# Altium PCB ltc3115.PcbDoc
Units mil, origin at the board's own origin, x right, y up, seen from the top; angles counter-clockwise.
Board outline 6000 x 4000 mil, 2 copper layers (Top Layer, Bottom Layer); 21 components, 14 nets, 72 pads, 85 vias.
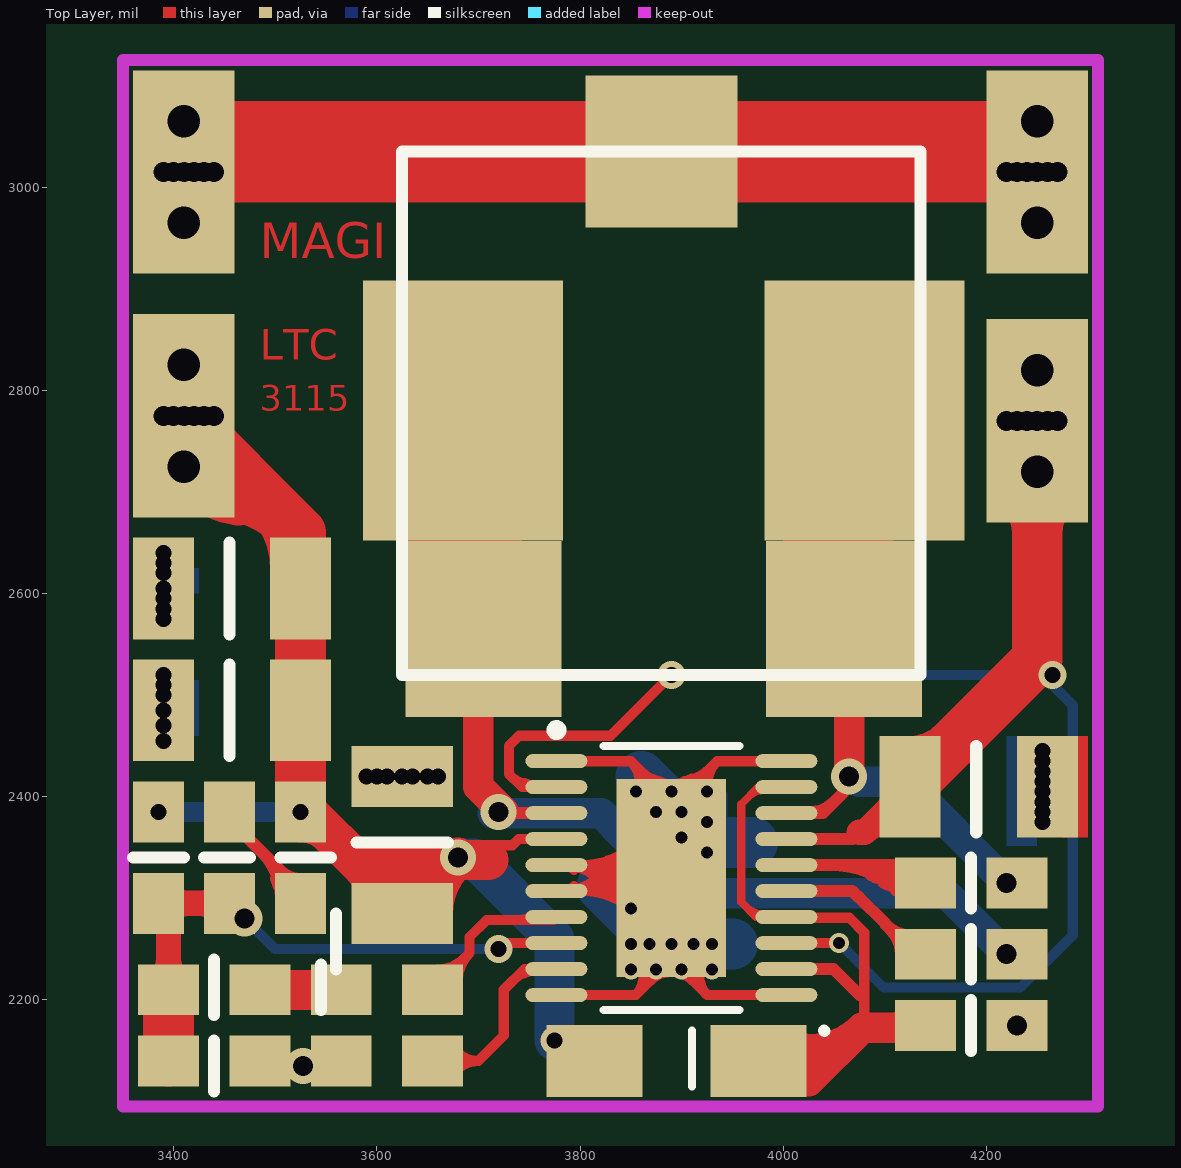
[diagram p0: Top Layer view]
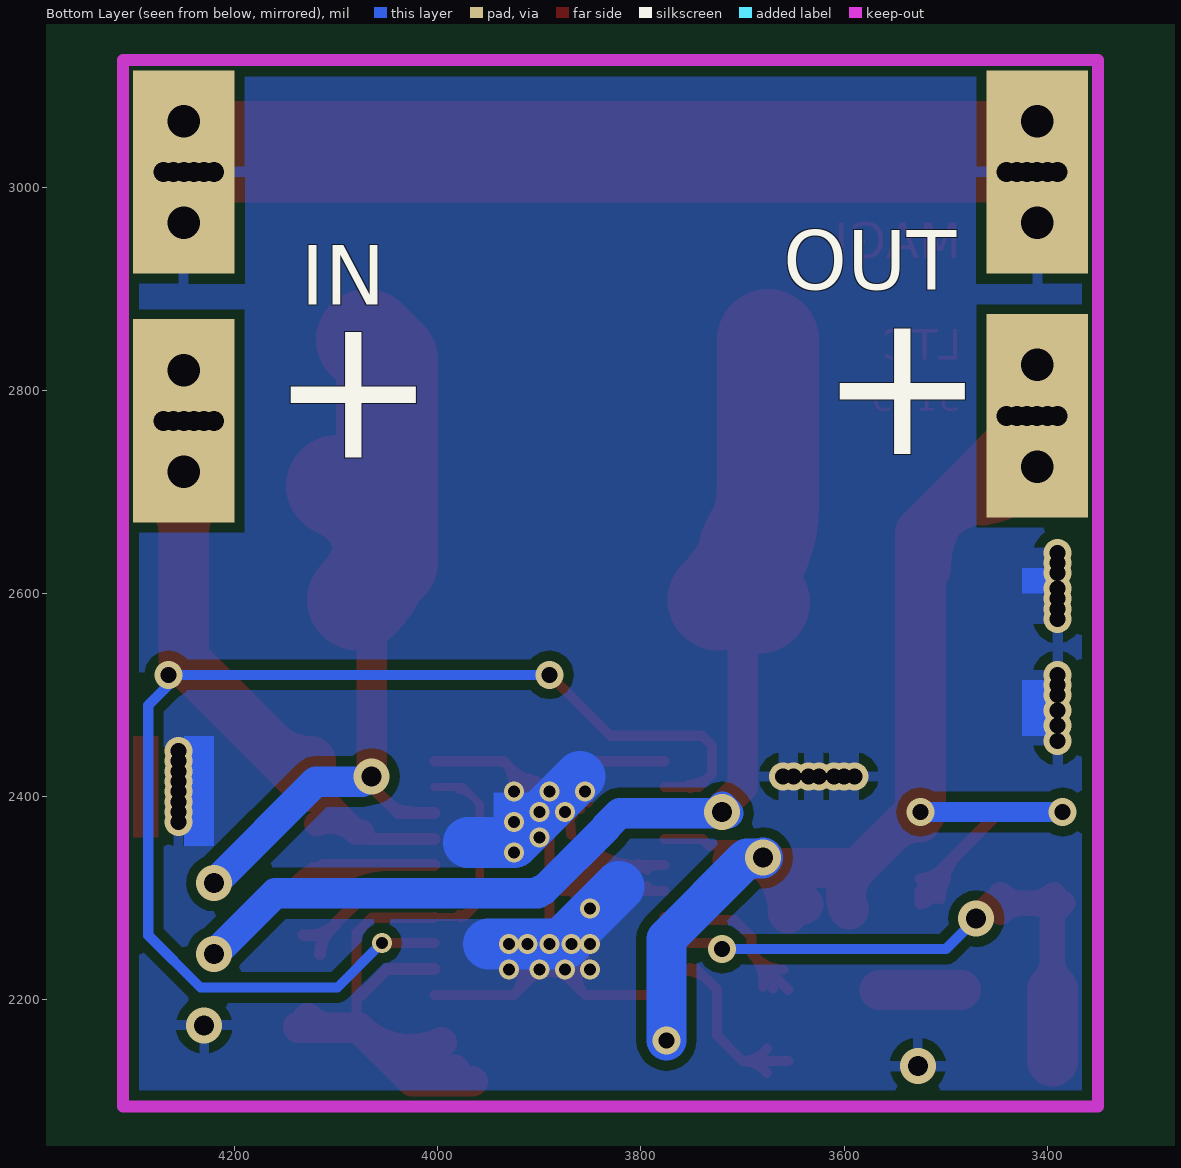
[diagram p1: Bottom Layer view, seen from below]

## Layer stack, top to bottom
Top Layer: signal copper 1.4
Dielectric: dielectric 12.6, FR-4, Dk 4.8
Bottom Layer: signal copper 1.4

## Board outline
1000,1000 7000,1000 7000,5000 1000,5000

## Design rules (kind name [scope] priority, off if disabled: settings)
Clearance [All] p1: gap=10
PolygonConnect [All] p1: connectstyle=Relief reliefconductorwidth=10 reliefentries=4 polygonreliefangle="90 Angle" airgapwidth=10
RoutingVias [All] p1: holewidth=28 width=50 viastyle="Through Hole" minholewidth=28 minwidth=50 maxholewidth=28 maxwidth=50
SolderMaskExpansion [All] p1: expansion=4
Width [All] p1: maxlimit=100 minlimit=5 preferedwidth=20
28 further rules are at their usual default settings.

## Components (designator, comment, footprint, x,y, rotation, side; value= is the part's Value field where it differs from the comment)
C1 "CAP_1" 0805 4140,2245 r0 top
C2 "CAP_1" 0805 3525,2385 r270 top
C3 "CAP_1" 0805 4230,2315 r180 top
C4 "CAP_1" 0805 3395,2210 r0 top
C5 "CAP_1" 1210 4125,2410 r0 top
C6 "CAP_1" 0805 4140,2175 r0 top
C7 "CAP_1" 1210 3525,2485 r180 top
C8 "CAP_1" 1210 3525,2605 r180 top
C9 "CAP_1" 1210 3625,2285 r90 top
D1 "DIODE_1" SMA 3895,2140 r0 top
J1 "CON1" PCBConnect 4250,2720 r90 top
J2 "CON1" PCBConnect 3410,2725 r90 top
J3 "CON1" PCBConnect 4250,2965 r90 top
J4 "CON1" PCBConnect 3410,2965 r90 top
L1 "INDUCTOR" 13*13 3925,2885 r0 top
R3 "RES1" 0805 3385,2295 r90 top
R4 "RES1" 0805 3455,2385 r270 top
R5 "RES1" 0805 3565,2210 r0 top
R6 "RES1" 0805 3485,2140 r180 top
R7 "RES1" 0805 3565,2140 r0 top
U1 "LTC3115" LTC3115 3890,2320 r0 top

## Footprints (in the part's own frame and the unit in brackets; to place one, negate y for a bottom-side part, rotate by r counter-clockwise, add the part's x,y. Pads: shape width x height; smd on the part's side, far side on the other; paste and mask are expansions set on the pad)
13*13 [mm]
  rect 5x6.5 smd: 1(-6.096,-2.667) 2(3.937,-2.667)
  rect 3.9x4.4 smd: 1(-5.588,-8.128) 2(3.429,-8.128)
  rect 3.8x3.8 smd: 3(-1.143,3.81)
  silkscreen extent -7.62,-9.27 5.33,3.81
0805 [mil]
  rect 60x50 smd: 1(0,0) 2(90,0)
1210 [mil]
  rect 60x100 smd: 1(0,0) 2(135,0)
  silkscreen extent 65,-45 65,40
LTC3115 [mm] "TSOP, 20-Leads, Body 6.50x4.40mm, Pitch 0.65mm, Thermal Pad 4.95.2x2.74.2mm, IPC Medium Density"
  oval 1.55x0.35 smd: 1(-2.875,2.925) 2(-2.875,2.275) 3(-2.875,1.625) 4(-2.875,0.975) 5(-2.875,0.325) 6(-2.875,-0.325) 7(-2.875,-0.975) 8(-2.875,-1.625) 9(-2.875,-2.275) 10(-2.875,-2.925) 11(2.875,-2.925) 12(2.875,-2.275) 13(2.875,-1.625) 14(2.875,-0.975) 15(2.875,-0.325) 16(2.875,0.325) 17(2.875,0.975) 18(2.875,1.625) 19(2.875,2.275) 20(2.875,2.925)
  rect 2.74x4.95 smd: 21(0,0)
  silkscreen extent -3,-3.3 1.7,3.82, body extent -2.25,-3.3 2.25,3.3, height 1.2
PCBConnect [mil]
  oct 50x50 hole 32: 1(0,0)
  rect 200x100 smd: 1(50,0)
  rect 200x100 smd far side: 1(50,0)
  round 50 hole 32: 1(100,0)
SMA [mm] "DO-214-AC/SMA; 2 C-Bend Leads; Body 5 x 2.7 mm, inc. leads (LxW)"
  rect 2.4x1.8 smd: 1(-2.05,0) 2(2.05,0)
  silkscreen extent 0.38,-0.64 0.38,0.76

## Part data
C1 C2 C3 C4 C5 C6 C7 C8 C9: "Capacitor"
D1: "Diode"
J1 J2 J3 J4: "Connector"

## Via types
v1: diameter 27.56, hole 15.75, Top Layer to Bottom Layer, 34 vias
v2: diameter 35.43, hole 19.68, Top Layer to Bottom Layer, 32 vias
v3: diameter 19.68, hole 11.81, Top Layer to Bottom Layer, 19 vias

## Nets (pads, with @x,y where several pads share a name; then routed paths per layer and width w, separated by ;. In a path a pad name is that pad's centre, name@x,y a point inside that pad or via, vN(x,y) a via of type N, cw(c..) or ccw(c..) an arc to the next point about the centre after c; other vN are vias at no path point)
GND: C5.2 C6.2 C7.2 C8.2 C9.2 J3.1 J4.1 L1.3 R6.1 R7.1 U1.1 U1.5 U1.6 U1.10 U1.11 U1.20 U1.21 | length 4988.5
  Top Layer w10: U1.10 3854.84,2204.84 ; U1.1 3776.97,2435 3850,2435 ; U1.6@3793.41,2311.26 cw(c3794.53,2310.61) U1.6@3794.19,2311.86 ; U1.5@3793.41,2328.74 ccw(c3794.53,2329.39) U1.5@3794.19,2328.14 ; 3807.67,2310.56 ccw(c3810.06,2301.64) 3802.07,2306.26 cw(c3824.09,2293.54) 3817.51,2318.11 ; 3807.67,2329.44 cw(c3810.06,2338.36) 3802.07,2333.74 ccw(c3824.09,2346.46) 3817.51,2321.89 ; U1.21@3868.94,2363.04 cw(c3924.37,2364.26) 3910.02,2417.8 ; U1.21@3871.63,2417.36 cw(c3857.82,2365.86) U1.21@3911.01,2361.97 ; U1.21@3877.2,2332.8 U1.5 ; U1.11 3925.16,2204.84 ; U1.20 4003.03,2435 3935,2435 ; U1.6 ccw(c3776.81,2392.9) 3848.86,2346.5 cw(c3776.81,2392.9) U1.6 ; U1.6 3877.2,2307.2 U1.21 ; U1.5 cw(c3776.81,2247.1) 3848.86,2293.5 ccw(c3776.81,2247.1) U1.5 ; 3850,2435 cw(c3828.57,2413.57) 3852.06,2394.42 ccw(c3828.57,2413.57) 3850,2435 ; 3850,2435 3890,2395 U1.21@3890,2390 ; 3854.84,2204.84 ccw(c3836.04,2223.65) 3855.04,2242.25 cw(c3836.04,2223.65) 3854.84,2204.84 ; 3854.84,2204.84 U1.21@3890,2240 ; U1.21@3890,2227.56 cw(c3890,2197.52) 3911.24,2218.76 ccw(c3890,2197.52) U1.21@3890,2227.56 ; U1.21@3890,2227.56 ccw(c3890,2197.52) 3868.76,2218.76 cw(c3890,2197.52) U1.21@3890,2227.56 ; U1.21@3890,2240 U1.21 ; U1.21@3890,2240 3925.16,2204.84 ; U1.21 U1.21@3890,2390 ; U1.21@3890,2390 3935,2435 ; U1.21@3890,2412.44 ccw(c3890,2466.62) 3928.31,2428.31 cw(c3890,2466.62) U1.21@3890,2412.44 ; U1.21@3890,2412.44 cw(c3890,2454.55) 3860.23,2424.77 ccw(c3890,2454.55) U1.21@3890,2412.44 ; 3925.16,2204.84 cw(c3943.96,2223.65) 3924.96,2242.25 ccw(c3943.96,2223.65) 3925.16,2204.84 ; 3935,2435 ccw(c3959.77,2410.23) 3930.66,2390.73 cw(c3959.77,2410.23) 3935,2435 ; U1.6@3795.15,2307.2 ccw(c3795.15,2381.09) 3857.26,2341.08 cw(c3795.15,2381.09) U1.6@3795.15,2307.2 ; U1.5@3795.15,2332.8 cw(c3795.15,2258.91) 3857.26,2298.92 ccw(c3795.15,2258.91) U1.5@3795.15,2332.8 ; U1.6@3802.75,2307.2 cw(c3802.75,2232.75) 3855.4,2285.4 ccw(c3802.75,2232.75) U1.6@3802.75,2307.2 ; U1.5@3802.75,2332.8 ccw(c3802.75,2407.25) 3855.4,2354.6 cw(c3802.75,2407.25) U1.5@3802.75,2332.8 ; 3813.48,2307.2 ccw(c3813.48,2369.28) 3865.67,2335.67 cw(c3813.48,2369.28) 3813.48,2307.2 ; 3813.48,2332.8 cw(c3813.48,2270.72) 3865.67,2304.33 ccw(c3813.48,2270.72) 3813.48,2332.8 ; 3826.89,2307.2 cw(c3826.89,2256.89) 3862.47,2292.47 ccw(c3826.89,2256.89) 3826.89,2307.2 ; 3826.89,2332.8 ccw(c3826.89,2383.11) 3862.47,2347.53 cw(c3826.89,2383.11) 3826.89,2332.8 ; 3831.82,2307.2 ccw(c3831.82,2357.47) 3874.08,2330.25 cw(c3831.82,2357.47) 3831.82,2307.2 ; 3831.82,2332.8 cw(c3831.82,2282.53) 3874.08,2309.75 ccw(c3831.82,2282.53) 3831.82,2332.8 ; 3857.83,2427.17 cw(c3837.2,2406.54) 3859.82,2388.1 ccw(c3837.2,2406.54) 3857.83,2427.17 ; 3861.99,2211.99 ccw(c3843.26,2230.72) 3862.18,2249.25 cw(c3843.26,2230.72) 3861.99,2211.99 ; 3865.66,2419.34 cw(c3845.82,2399.51) 3867.57,2381.78 ccw(c3845.82,2399.51) 3865.66,2419.34 ; 3869.13,2219.13 ccw(c3850.48,2237.79) 3869.33,2256.25 cw(c3850.48,2237.79) 3869.13,2219.13 ; U1.21@3910.67,2256.25 ccw(c3929.52,2237.79) 3910.87,2219.13 cw(c3929.52,2237.79) U1.21@3910.67,2256.25 ; U1.21@3914.04,2379.61 cw(c3939.15,2396.42) 3917.78,2417.78 ccw(c3939.15,2396.42) U1.21@3914.04,2379.61 ; U1.21@3917.82,2249.25 ccw(c3936.74,2230.72) 3918.01,2211.99 cw(c3936.74,2230.72) U1.21@3917.82,2249.25 ; U1.21@3922.35,2385.17 cw(c3949.46,2403.32) 3926.39,2426.39 ccw(c3949.46,2403.32) U1.21@3922.35,2385.17
  Top Layer w100: v2(3410,3015) 3430,3035 L1.3 4230,3035 v2(4250,3015)
  Bottom Layer w50: 3821.66,2311.66 3871.65,2261.67 3871.65,2258.35 3875,2255 3950,2255 ; 3860,2420 3925,2355 3970,2355
  other v1: 4255,2375 4255,2385 4255,2395 4255,2405 4255,2415 3590,2420 3600,2420 3610,2420 3625,2420 3635,2420 3650,2420 3660,2420 4255,2425 4255,2435 4255,2445 3390,2455 3390,2470 3390,2485 3390,2500 3390,2510 3390,2520 3390,2575 3390,2585 3390,2595 3390,2605 3390,2620 3390,2630 3390,2640
  other v2: 3527.5,2135 4230,2175 3390,3015 3400,3015 3420,3015 3430,3015 3440,3015 4220,3015 4230,3015 4240,3015 4260,3015 4270,3015
  other v3: 3850,2230 3875,2230 3900,2230 3930,2230 3850,2255 3868.35,2255.04 3890,2255 3911.65,2255.04 3930,2255 3850,2290 3925,2345 3900,2360 3925,2375 3875,2385 3900,2385 3855,2405 3890,2405 3925,2405
NetC1_1: C1.1 U1.15 | length 311.4
  Top Layer w11.81: U1.15 4067.8,2307.2 4073.23,2301.77 4073.95,2301.77 4100.75,2274.97 4100.75,2274.25 ; C1.1@4112.5,2262.5 4100.75,2274.25 ; 4100.75,2274.25 ccw(c4126.75,2300.25) C1.1@4132.18,2263.88 ; 4100.75,2274.25 ccw(c4126.75,2300.25) C1.1@4132.18,2263.88 ; 4100.75,2274.25 ccw(c4126.75,2300.25) C1.1@4132.18,2263.88 ; 4105.94,2269.06 cw(c4081.88,2245) C1.1@4115.91,2245 ; 4105.94,2269.06 cw(c4081.88,2245) C1.1@4115.91,2245 ; 4105.94,2269.06 cw(c4081.88,2245) C1.1@4115.91,2245
NetC1_2: C1.2 L1.1 U1.3 | length 1909.4
  Top Layer w11.81: v2@3724.42,2385.58 3726.02,2383.98 U1.3
  Top Layer w30: L1.1@3700,2580 3700,2410 v2@3724.42,2385.58
  Top Layer w100: L1.1@3675,2850 L1.1@3675,2685 ; L1.1@3675,2685 ccw(c3783.48,2685) L1.1@3720.53,2596.65 ; L1.1@3675,2685 ccw(c3783.48,2685) L1.1@3720.53,2596.65 ; L1.1@3675,2685 ccw(c3783.48,2685) L1.1@3720.53,2596.65 ; L1.1@3675,2711.9 ccw(c3842.06,2711.9) L1.1@3723.93,2593.77 ; L1.1@3675,2711.9 ccw(c3842.06,2711.9) L1.1@3723.93,2593.77 ; L1.1@3675,2711.9 ccw(c3842.06,2711.9) L1.1@3723.93,2593.77 ; L1.1@3683.82,2591.21 ccw(c3637.89,2626.71) L1.1@3688.16,2655.73 ; L1.1@3683.82,2591.21 ccw(c3637.89,2626.71) L1.1@3688.16,2655.73 ; L1.1@3683.82,2591.21 ccw(c3637.89,2626.71) L1.1@3688.16,2655.73
  Bottom Layer w30: v2(3720,2385) 3720,2390 3713.98,2383.98 3821.02,2383.98 3833.5,2371.5 3833.5,2370.53 3896.16,2307.87 3898.62,2307.87 3901.49,2305 4160,2305 v2(4220,2245)
NetC2_2: C2.2 R4.1 | length 520
  Top Layer w12: R4.1 3455,2377.37 3525,2307.37 C2.2 ; 3487.35,2345.02 cw(c3442.33,2300) C2.2@3506,2300 ; 3487.35,2345.02 cw(c3442.33,2300) C2.2@3506,2300 ; 3487.35,2345.02 cw(c3442.33,2300) C2.2@3506,2300 ; C2.2@3500.83,2319.3 ccw(c3534.53,2328.33) C2.2@3523.41,2295.26 ; C2.2@3500.83,2319.3 ccw(c3534.53,2328.33) C2.2@3523.41,2295.26 ; C2.2@3500.83,2319.3 ccw(c3534.53,2328.33) C2.2@3523.41,2295.26 ; 3505.15,2327.22 ccw(c3525,2347.07) C2.2@3525,2319 ; 3505.15,2327.22 ccw(c3525,2347.07) C2.2@3525,2319 ; 3505.15,2327.22 ccw(c3525,2347.07) C2.2@3525,2319 ; C2.2@3507.84,2324.54 cw(c3483.3,2300) C2.2@3518,2300 ; C2.2@3507.84,2324.54 cw(c3483.3,2300) C2.2@3518,2300 ; C2.2@3507.84,2324.54 cw(c3483.3,2300) C2.2@3518,2300
NetC3_1: C3.1 L1.2 U1.18 | length 1284
  Top Layer w11.81: U1.18 4038.98,2383.98 v2@4060,2405 ; U1.18@4026.81,2384.96 ccw(c4026.81,2416.71) 4049.26,2394.26 ; U1.18@4026.81,2384.96 ccw(c4026.81,2416.71) 4049.26,2394.26 ; U1.18@4026.81,2384.96 ccw(c4026.81,2416.71) 4049.26,2394.26
  Top Layer w30: L1.2@4050,2635 4065,2620 v2@4065,2425
  Top Layer w100: L1.2@4050,2635 4050,2830 L1.2@4070,2850 ; L1.2@4050,2631.17 cw(c4131.53,2631.17) L1.2@4099.2,2706.02 ; L1.2@4050,2631.17 cw(c4131.53,2631.17) L1.2@4099.2,2706.02 ; L1.2@4050,2631.17 cw(c4131.53,2631.17) L1.2@4099.2,2706.02 ; L1.2@4050,2663.62 ccw(c4148.77,2663.62) L1.2@4078.93,2593.77 ; L1.2@4050,2663.62 ccw(c4148.77,2663.62) L1.2@4078.93,2593.77 ; L1.2@4050,2663.62 ccw(c4148.77,2663.62) L1.2@4078.93,2593.77
  Bottom Layer w30: v2@4074.49,2415 4120,2415 v2(4220,2315)
  other v2: 4065,2420
NetC3_2: C3.2 U1.16 | length 1100
  Top Layer w11.81: U1.16 C3.2@4112.8,2332.8 ; 4045.94,2332.8 cw(c4045.94,2225.94) C3.2@4121.5,2301.5 ; 4045.94,2332.8 cw(c4045.94,2225.94) C3.2@4121.5,2301.5 ; 4045.94,2332.8 cw(c4045.94,2225.94) C3.2@4121.5,2301.5 ; 4074.45,2332.8 cw(c4074.45,2254.45) C3.2@4129.85,2309.85 ; 4074.45,2332.8 cw(c4074.45,2254.45) C3.2@4129.85,2309.85 ; 4074.45,2332.8 cw(c4074.45,2254.45) C3.2@4129.85,2309.85 ; 4086.44,2322.81 ccw(c4100.61,2346.12) C3.2@4120.84,2327.81 ; 4086.44,2322.81 ccw(c4100.61,2346.12) C3.2@4120.84,2327.81 ; 4086.44,2322.81 ccw(c4100.61,2346.12) C3.2@4120.84,2327.81 ; 4098.25,2328.09 ccw(c4109.32,2347.28) C3.2@4123.11,2329.94 ; 4098.25,2328.09 ccw(c4109.32,2347.28) C3.2@4123.11,2329.94 ; 4098.25,2328.09 ccw(c4109.32,2347.28) C3.2@4123.11,2329.94 ; 4098.65,2315.38 ccw(c4111.4,2336.36) C3.2@4129.6,2319.89 ; 4098.65,2315.38 ccw(c4111.4,2336.36) C3.2@4129.6,2319.89 ; 4098.65,2315.38 ccw(c4111.4,2336.36) C3.2@4129.6,2319.89 ; 4102.97,2332.8 cw(c4102.97,2282.97) C3.2@4138.2,2318.2 ; 4102.97,2332.8 cw(c4102.97,2282.97) C3.2@4138.2,2318.2 ; 4102.97,2332.8 cw(c4102.97,2282.97) C3.2@4138.2,2318.2 ; 4106.27,2323.46 cw(c4095.23,2304.34) C3.2@4116.56,2310.06 ; 4106.27,2323.46 cw(c4095.23,2304.34) C3.2@4116.56,2310.06 ; 4106.27,2323.46 cw(c4095.23,2304.34) C3.2@4116.56,2310.06 ; C3.2@4110.87,2307.96 ccw(c4122.19,2326.59) C3.2@4138.36,2311.96 ; C3.2@4110.87,2307.96 ccw(c4122.19,2326.59) C3.2@4138.36,2311.96 ; C3.2@4110.87,2307.96 ccw(c4122.19,2326.59) C3.2@4138.36,2311.96
NetC4_1: C4.1 R3.1 R4.2 R6.2 U1.8 | length 996.2
  Top Layer w10: v1@3720,2256.02 U1.8
  Top Layer w25: C4.1 3395,2285 R3.1 R4.2 v2(3470,2280) ; C4.1@3386.16,2218.84 ccw(c3364.82,2240.18) 3395,2240.18 ; C4.1@3386.16,2218.84 ccw(c3364.82,2240.18) 3395,2240.18 ; C4.1@3386.16,2218.84 ccw(c3364.82,2240.18) 3395,2240.18 ; R3.1@3393.84,2286.16 cw(c3415.18,2264.82) 3415.18,2295 ; R3.1@3393.84,2286.16 cw(c3415.18,2264.82) 3415.18,2295 ; R3.1@3393.84,2286.16 cw(c3415.18,2264.82) 3415.18,2295 ; R3.1@3393.84,2303.84 ccw(c3415.18,2325.18) 3415.18,2295 ; R3.1@3393.84,2303.84 ccw(c3415.18,2325.18) 3415.18,2295 ; R3.1@3393.84,2303.84 ccw(c3415.18,2325.18) 3415.18,2295 ; 3395,2240.18 ccw(c3425.18,2240.18) C4.1@3403.84,2218.84 ; 3395,2240.18 ccw(c3425.18,2240.18) C4.1@3403.84,2218.84 ; 3395,2240.18 ccw(c3425.18,2240.18) C4.1@3403.84,2218.84 ; 3424.82,2295 cw(c3424.82,2264.82) R4.2@3446.16,2286.16 ; 3424.82,2295 ccw(c3424.82,2325.18) R4.2@3446.16,2303.84 ; 3424.82,2295 cw(c3424.82,2264.82) R4.2@3446.16,2286.16 ; 3424.82,2295 ccw(c3424.82,2325.18) R4.2@3446.16,2303.84 ; 3424.82,2295 cw(c3424.82,2264.82) R4.2@3446.16,2286.16 ; 3424.82,2295 ccw(c3424.82,2325.18) R4.2@3446.16,2303.84
  Top Layer w50: R6.2 C4.1
  Bottom Layer w10: v2(3470,2280) 3500,2250 v1(3720,2250)
NetC4_2: C4.2 R5.1 | length 80
  Top Layer w39.37: C4.2 R5.1
NetR1_2: 
NetR5_2: R5.2 U1.7 | length 457.3
  Top Layer w10: R5.2 3691.22,2246.22 ; U1.7 3773.98,2278.78 3708.08,2278.78 3691.22,2261.92 3691.22,2246.22 ; R5.2@3660,2230 ccw(c3660,2266.21) 3685.61,2240.61 ; R5.2@3660,2230 ccw(c3660,2266.21) 3685.61,2240.61 ; R5.2@3660,2230 ccw(c3660,2266.21) 3685.61,2240.61 ; R5.2@3669.91,2211.31 cw(c3694.25,2214.53) R5.2@3676.89,2231.89 ; R5.2@3669.91,2211.31 cw(c3694.25,2214.53) R5.2@3676.89,2231.89 ; R5.2@3669.91,2211.31 cw(c3694.25,2214.53) R5.2@3676.89,2231.89 ; R5.2@3679.83,2212.62 cw(c3719.56,2217.88) 3691.22,2246.22 ; R5.2@3679.83,2212.62 cw(c3719.56,2217.88) 3691.22,2246.22 ; R5.2@3679.83,2212.62 cw(c3719.56,2217.88) 3691.22,2246.22 ; 3741.78,2278.78 ccw(c3741.78,2293.02) U1.7@3751.85,2282.95 ; 3741.78,2278.78 ccw(c3741.78,2293.02) U1.7@3751.85,2282.95 ; 3741.78,2278.78 ccw(c3741.78,2293.02) U1.7@3751.85,2282.95
NetR7_2: R7.2 U1.9 | length 432.8
  Top Layer w10: R7.2 3700,2140 ; U1.9 3745.43,2230.43 3725,2210 3725,2165 3700,2140 ; R7.2@3676,2128 cw(c3700,2110) 3700,2140 ; R7.2@3676,2128 cw(c3700,2110) 3700,2140 ; R7.2@3676,2128 cw(c3700,2110) 3700,2140 ; R7.2@3676,2152 ccw(c3700,2170) 3700,2140 ; R7.2@3676,2152 ccw(c3700,2170) 3700,2140 ; R7.2@3676,2152 ccw(c3700,2170) 3700,2140 ; 3736.72,2221.72 cw(c3753.19,2205.26) U1.9@3753.19,2228.54 ; 3736.72,2221.72 cw(c3753.19,2205.26) U1.9@3753.19,2228.54 ; 3736.72,2221.72 cw(c3753.19,2205.26) U1.9@3753.19,2228.54 ; 3745,2226.35 ccw(c3742.2,2236.78) U1.9@3751.55,2231.38 ; 3745,2226.35 ccw(c3742.2,2236.78) U1.9@3751.55,2231.38 ; 3745,2226.35 ccw(c3742.2,2236.78) U1.9@3751.55,2231.38
VCC: C6.1 D1.2 U1.12 U1.14 U1.19 | length 1341.5
  Top Layer w8: 3971.02,2286.21 ccw(c3976.36,2291.55) U1.14@3978.68,2284.36 ; U1.14 3973.39,2281.61 3958.68,2296.32 3958.68,2392.63 3975.62,2409.57 U1.19 ; 3964.08,2290.92 ccw(c3979.57,2306.4) U1.14@3979.57,2284.5 ; 3964.08,2290.92 ccw(c3979.57,2306.4) U1.14@3979.57,2284.5 ; 3964.08,2290.92 ccw(c3979.57,2306.4) U1.14@3979.57,2284.5 ; 3967.04,2287.86 cw(c3962.77,2271.92) U1.14@3977.06,2280.17 ; 3967.04,2287.86 cw(c3962.77,2271.92) U1.14@3977.06,2280.17 ; 3967.04,2287.86 cw(c3962.77,2271.92) U1.14@3977.06,2280.17 ; 3967.89,2401.84 cw(c3979.57,2390.16) U1.19@3979.57,2406.68 ; 3967.89,2401.84 cw(c3979.57,2390.16) U1.19@3979.57,2406.68 ; 3967.89,2401.84 cw(c3979.57,2390.16) U1.19@3979.57,2406.68
  Top Layer w10: U1.14 4003.94,2280.87 4065.29,2280.87 4079.84,2266.31 4079.84,2174.84 4077.5,2172.5
  Top Layer w11.81: U1.12 4044.18,2230.43 4044.33,2230.28 4049.72,2230.28 4075,2205
  Top Layer w25: C6.1@4137.5,2172.5 C6.1
  Top Layer w30: D1.2@3965.71,2120 4025,2120 4077.5,2172.5 ; C6.1@4137.5,2172.5 4077.5,2172.5 ; D1.2@3983.42,2131.36 ccw(c4007.58,2182.26) 4047.42,2142.42 ; D1.2@3983.42,2131.36 ccw(c4007.58,2182.26) 4047.42,2142.42 ; D1.2@3983.42,2131.36 ccw(c4007.58,2182.26) 4047.42,2142.42 ; D1.2@3996.28,2158.46 ccw(c4026.94,2223.06) 4077.5,2172.5 ; D1.2@3996.28,2158.46 ccw(c4026.94,2223.06) 4077.5,2172.5 ; D1.2@3996.28,2158.46 ccw(c4026.94,2223.06) 4077.5,2172.5 ; 4104.82,2172.5 ccw(c4104.82,2205.18) C6.1@4127.93,2182.07 ; 4104.82,2172.5 ccw(c4104.82,2205.18) C6.1@4127.93,2182.07 ; 4104.82,2172.5 ccw(c4104.82,2205.18) C6.1@4127.93,2182.07
VIN: C5.1 J1.1 U1.2 U1.13 U1.17 | length 2436.6
  Top Layer w10: U1.2 3742.86,2409.57 3730,2422.43 3730,2450 3740,2460 3830,2460 v1(3890,2520) ; U1.13 v3(4055,2256.02) ; 3732.33,2420.1 ccw(c3753.19,2440.96) U1.2@3753.19,2411.46 ; 3732.33,2420.1 ccw(c3753.19,2440.96) U1.2@3753.19,2411.46 ; 3732.33,2420.1 ccw(c3753.19,2440.96) U1.2@3753.19,2411.46 ; 3745,2413.65 cw(c3742.2,2403.22) U1.2@3751.55,2408.62 ; 3745,2413.65 cw(c3742.2,2403.22) U1.2@3751.55,2408.62 ; 3745,2413.65 cw(c3742.2,2403.22) U1.2@3751.55,2408.62
  Top Layer w12: U1.17 4068.39,2358.39 4075,2365
  Top Layer w25: 4075,2365 4080,2365 ; C5.1 4080,2365 ; 4080,2365 cw(c4106.19,2338.82) C5.1@4118.96,2373.57 ; 4080,2365 cw(c4106.19,2338.82) C5.1@4118.96,2373.57 ; 4080,2365 cw(c4106.19,2338.82) C5.1@4118.96,2373.57
  Top Layer w50: C5.1 4250,2535 4250,2720 v2(4250,2770) ; C5.1@4125,2435 ccw(c4125,2495.36) 4167.68,2452.68 ; C5.1@4125,2435 ccw(c4125,2495.36) 4167.68,2452.68 ; C5.1@4125,2435 ccw(c4125,2495.36) 4167.68,2452.68 ; J1.1@4232.32,2702.32 cw(c4189.64,2659.64) 4250,2659.64 ; J1.1@4232.32,2702.32 cw(c4189.64,2659.64) 4250,2659.64 ; J1.1@4232.32,2702.32 cw(c4189.64,2659.64) 4250,2659.64 ; 4250,2659.64 cw(c4310.36,2659.64) J1.1@4267.68,2702.32 ; 4250,2659.64 cw(c4310.36,2659.64) J1.1@4267.68,2702.32 ; 4250,2659.64 cw(c4310.36,2659.64) J1.1@4267.68,2702.32
  Bottom Layer w10: v1(3890,2520) v1@4255,2520 ; v3(4055,2256.02) 4098.74,2212.28 4233.55,2212.28 4285,2263.73 4285,2490 v1@4255,2520 ; v1(4265,2520) v1@4255,2520
  other v2: 4220,2770 4230,2770 4240,2770 4260,2770 4270,2770
VOUT: C2.1 C7.1 C8.1 C9.1 D1.1 J2.1 R3.2 U1.4 | length 3832.7
  Top Layer w10: 3710,2352.28 3733.55,2352.28 3739.65,2358.39 U1.4
  Top Layer w39.37: v1(3525,2385) 3531.98,2385 3586.98,2330 ; C9.1@3654.82,2288.17 cw(c3680.46,2296.44) 3661.41,2315.5 ; 3710,2337.6 3682.4,2337.6 v2(3680,2340) v2@3670,2330 ; C2.1@3525,2374.68 cw(c3525,2332.93) 3554.53,2362.45 ; C2.1@3525,2374.68 cw(c3525,2332.93) 3554.53,2362.45 ; C2.1@3525,2374.68 cw(c3525,2332.93) 3554.53,2362.45 ; 3586.98,2330 cw(c3560,2303.02) C9.1@3595.42,2288.83 ; 3586.98,2330 cw(c3560,2303.02) C9.1@3595.42,2288.83 ; 3586.98,2330 cw(c3560,2303.02) C9.1@3595.42,2288.83 ; 3586.98,2330 v2@3670,2330 ; C9.1@3639.84,2293.93 ccw(c3610.38,2344.96) v2@3667.29,2329.71 ; C9.1@3639.84,2293.93 ccw(c3610.38,2344.96) v2@3667.29,2329.71 ; C9.1@3639.84,2293.93 ccw(c3610.38,2344.96) v2@3667.29,2329.71 ; C9.1@3655.22,2286.36 cw(c3706.77,2293.23) v2@3670,2330 ; C9.1@3655.22,2286.36 cw(c3706.77,2293.23) v2@3670,2330 ; C9.1@3655.22,2286.36 cw(c3706.77,2293.23) v2@3670,2330 ; C9.1@3655.32,2285 cw(c3728.5,2285) v2@3676.75,2336.75 ; C9.1@3655.32,2285 cw(c3728.5,2285) v2@3676.75,2336.75 ; C9.1@3655.32,2285 cw(c3728.5,2285) v2@3676.75,2336.75
  Top Layer w50: v2(3410,2775) 3525,2660 ; v1(3525,2385) C7.1 C8.1 3525,2660 ; J2.1@3410,2725 cw(c3424.38,2686.05) J2.1@3453.74,2715.41 ; J2.1@3410,2725 cw(c3424.38,2686.05) J2.1@3453.74,2715.41 ; J2.1@3410,2725 ccw(c3476.92,2773.16) 3463.65,2691.79 ; J2.1@3410,2725 cw(c3424.38,2686.05) J2.1@3453.74,2715.41 ; J2.1@3410,2725 ccw(c3476.92,2773.16) 3463.65,2691.79 ; J2.1@3410,2725 ccw(c3476.92,2773.16) 3463.65,2691.79 ; J2.1@3410,2725 cw(c3410,2604.29) 3495.36,2689.64 ; J2.1@3410,2725 cw(c3424.38,2686.05) J2.1@3453.74,2715.41 ; J2.1@3410,2725 ccw(c3476.92,2773.16) 3463.65,2691.79 ; J2.1@3410,2725 ccw(c3476.92,2773.16) 3463.65,2691.79 ; J2.1@3410,2725 cw(c3410,2604.29) 3495.36,2689.64 ; J2.1@3410,2725 ccw(c3476.92,2773.16) 3463.65,2691.79 ; J2.1@3410,2725 cw(c3410,2604.29) 3495.36,2689.64 ; J2.1@3410,2825 ccw(c3530.71,2825) J2.1@3445.36,2739.64 ; J2.1@3410,2825 ccw(c3530.71,2825) J2.1@3445.36,2739.64 ; J2.1@3410,2825 ccw(c3530.71,2825) J2.1@3445.36,2739.64 ; J2.1@3412.5,2700.13 cw(c3426.45,2561.45) 3525,2660 ; J2.1@3412.5,2700.13 cw(c3426.45,2561.45) 3525,2660 ; J2.1@3412.5,2700.13 cw(c3426.45,2561.45) 3525,2660 ; J2.1@3422.5,2703.35 cw(c3452.68,2651.08) 3468.3,2709.38 ; J2.1@3422.5,2703.35 cw(c3452.68,2651.08) 3468.3,2709.38 ; J2.1@3422.5,2703.35 cw(c3452.68,2651.08) 3468.3,2709.38 ; J2.1@3431.65,2737.5 ccw(c3483.92,2767.68) 3468.3,2709.38 ; J2.1@3431.65,2737.5 ccw(c3483.92,2767.68) 3468.3,2709.38 ; J2.1@3431.65,2737.5 ccw(c3483.92,2767.68) 3468.3,2709.38 ; 3491.72,2693.28 cw(c3423.43,2625) C8.1@3520,2625 ; 3491.72,2693.28 cw(c3423.43,2625) C8.1@3520,2625 ; 3491.72,2693.28 cw(c3423.43,2625) C8.1@3520,2625
  Bottom Layer w19.68: v1(3385,2385) v1(3525,2385)
  Bottom Layer w39.37: v2(3680,2340) 3680.71,2339.29 3695.71,2339.29 3775,2260 v1(3775,2160)
  other v2: 3390,2775 3400,2775 3420,2775 3430,2775 3440,2775

## Polygon pours and split planes (outlines as drawn)
GND on Bottom Layer "Keep-Out Layer-No Net" (solid, pour order 2): 3350,3125 3350,2095 4310,2095 4310,3125
no net on Bottom Solder "Keep-Out Layer-No Net" (solid): 3835,2330 3885,2280 3945,2280 3945,2225 3945,2220 3835,2220
no net on Bottom Solder "Keep-Out Layer-No Net" (solid): 3835,2405 3910,2330 3930,2330 3945,2330 3945,2420 3835,2420

## Keep-outs
Keep-Out Layer:
  lines w11.81: 3350,2095 3350,3125 4310,3125 4310,2095 3350,2095

## Other copper
Top Layer:
  rectangle net GND: 4275,2360 4300,2460
  text "MAGI" at 3485,2930 h35
  text "LTC" at 3485,2830 h30
  text "3115" at 3485,2780 h25
Bottom Layer:
  rectangle net GND: 4220,2351.75 4250,2460
  rectangle net GND: 3390,2600 3425,2625
  rectangle net GND: 3390,2460 3425,2515
  rectangle net GND: 3906.65,2380 3945,2404.2

## Silkscreen, mask and mechanical layers (free items; w line width, h text height)
Top Overlay:
  lines w11.81: 3360,2340 3410,2340 ; 3430,2340 3475,2340 ; 3440,2110 3440,2160 ; 3440,2185 3440,2240 ; 3505,2340 3555,2340 ; 3545,2190 3545,2235 ; 3560,2230 3560,2285 ; 4040,2170 4040.51,2169.49 ; 4185,2150 4185,2200 ; 4185,2220 4185,2270 ; 4185,2290 4185,2340
Bottom Overlay:
  text "-" at 3610,2900 h500
  text "-" at 4155,2900 h500
  text "OUT" at 3660,2880 h100
  text "IN" at 4135,2865 h100
  text "+" at 3625,2680 h300
  text "+" at 4165.5,2676.5 h300
Top Solder:
  rectangle: 4225,2540 4275,2665
  rectangle: 4275,2360 4300,2460